# EAGLE board C (EAGLE 7.5.0)
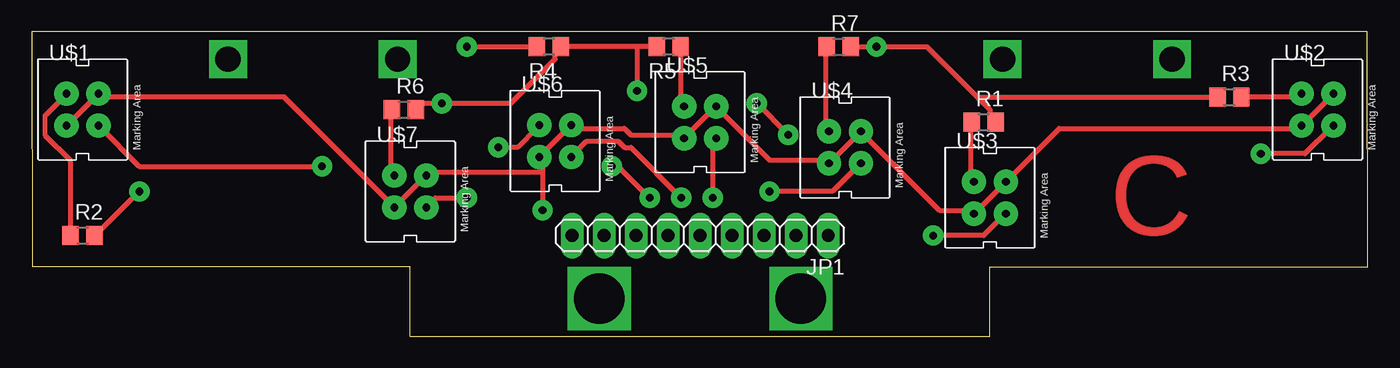
[diagram p0: board, top side]
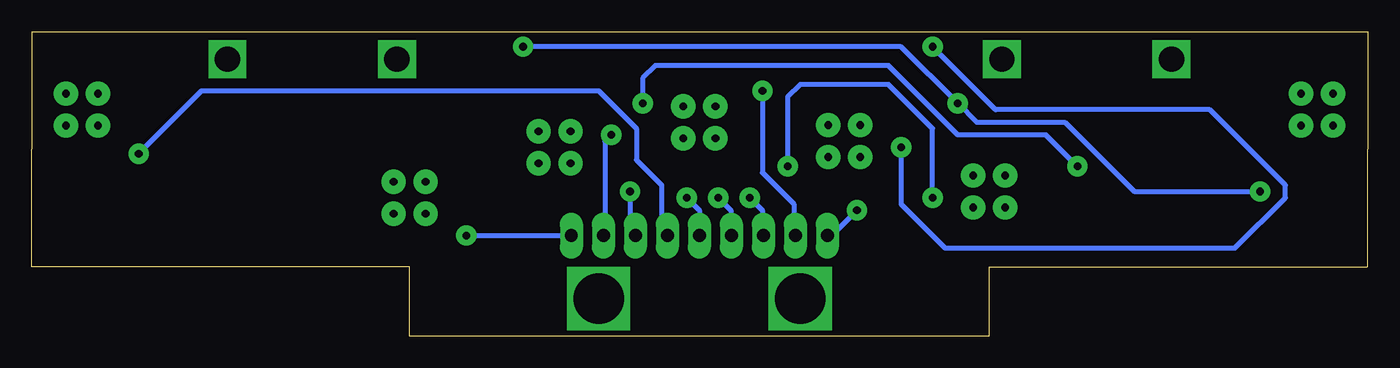
[diagram p1: board, bottom side, seen from below]

Size 106.05 x 24.21 mm. Coordinates in mm from the lower left corner, seen from the top.
Outline: 30.05,0 76.05,0 76.05,5.5 106.05,5.5 106,24.21 0,24.21 0.05,5.5 30.05,5.5 30.05,0
Copper layers (1*16): Top 0.035mm / dielectric 1.5mm / Bottom 0.035mm
Design rules "default *": minimum track width 0.4mm, minimum drill 24mil, track to track 20mil, track to pad 20mil, pad to pad 20mil, via to via 20mil, smd to smd 20mil, copper to edge 15mil, drill to drill 25mil, minimum pad ring 0.4mm, minimum via ring 0.5mm, stop-mask expansion 4mil, vias tented up to drill 0mil, thermal gap 10mil
tRestrict: area 42.1,6.5 to 64.1,9.5
bRestrict: area 0.6,14 to 7.6,22; area 26.6,7.5 to 33.6,15.5; area 38.1,11.5 to 45.1,19.5; area 49.6,13 to 56.6,21; area 61.1,11 to 68.1,19; area 72.6,7 to 79.6,15; area 98.6,14 to 105.6,22

## Footprints (pad centres in the part's own frame; a part is rotated, then mirrored left to right if it is on the bottom)
1X09 = drill 1.016 long: 1 -10.16,0; 2 -7.62,0; 3 -5.08,0; 4 -2.54,0; 5 0,0; 6 2.54,0; 7 5.08,0; 8 7.62,0; 9 10.16,0
R0805 = smd 1.3 x 1.5: 1 -0.95,0; 2 0.95,0
4 = drill 0.61 pad 1.93: A -1.27,1.27; C 1.27,-1.27; E 1.27,1.27; K -1.27,-1.27

## Placement (x,y rotation side)
JP1  [1X09]  53.05,8 180 top
R1  [R0805]  75.55,17 0 top
R2  [R0805]  4.05,8 0 top
R3  [R0805]  95.05,19 0 top
R4  [R0805]  41.05,23 180 top
R5  [R0805]  50.55,23 180 top
R6  [R0805]  29.55,18 0 top
R7  [R0805]  64.05,23 0 top
U$1  CNY70  [4]  4.05,18 0 top
U$2  CNY70  [4]  102.05,18 0 top
U$3  CNY70  [4]  76.05,11 0 top
U$4  CNY70  [4]  64.55,15 0 top
U$5  CNY70  [4]  53.05,17 0 top
U$6  CNY70  [4]  41.55,15.5 0 top
U$7  CNY70  [4]  30.05,11.5 0 top

## Library data of the parts
JP1 = pinhead
R1-R7 = resistor
U$1-U$7 = cny70

## Nets
5V: JP1.8 R1.2 R2.2 R3.1 R4.1 R5.2 R6.2 R7.2
GND: JP1.9 U$1.E U$1.K U$2.E U$2.K U$3.E U$3.K U$4.E U$4.K U$5.E U$5.K U$6.E U$6.K U$7.E U$7.K
N$1: R2.1 U$1.A
N$3: R3.2 U$2.A
N$5: R1.1 U$3.A
N$7: R7.1 U$4.A
N$11: R5.1 U$5.A
N$13: R4.2 U$6.A
N$15: R6.1 U$7.A
OUT0: JP1.1 U$3.C
OUT1: JP1.2 U$1.C
OUT2: JP1.3 U$4.C
OUT3: JP1.4 U$2.C
OUT4: JP1.5 U$5.C
OUT5: JP1.6 U$6.C
OUT6: JP1.7 U$7.C

## Tracks (layer width: path | path; a pad name or v marks a point on that pad's centre or on a via)
5V  (via drill 0.61)
  Top 0.4: 75.05,19 71.05,23 v67.05,23 R7.2 | 75.05,19 76.05,18 76.05,17 R1.2 | 75.05,19 R3.1 | R5.2 48.05,23 | 48.05,23 R4.1 41.55,23 41.55,22 38.05,18.5 v32.55,18.5 31.05,18.5 30.55,18 R6.2 | 48.05,23 v48.05,19.5 | v8.55,11.5 5.05,8 R2.2
  Bottom 0.4: v48.05,19.5 48.05,13 45.55,10.5 45.55,8 JP1.8 | v8.55,11.5 18.55,11.5 24.05,17 31.05,17 v32.55,18.5 37.05,23 v67.05,23
GND  (via drill 0.61)
  Top 0.4: U$2.E U$2.K 100.55,16.5 81.55,16.5 U$3.E U$3.K 74.55,10 72.05,10 66.05,16 U$4.E U$4.K 63.05,14 58.55,14 54.55,18 U$5.E U$5.K 51.55,16 47.55,16 47.05,16.5 43.05,16.5 U$6.E U$6.K 40.55,14 40.55,13 | U$1.K U$1.E 5.55,19 20.05,19 28.55,10.5 U$7.K U$7.E 31.55,13 40.55,13 | 40.55,13 v40.55,10
  Bottom 0.4: v40.55,10 42.55,8 JP1.9
N$1
  Top 0.4: R2.1 3.05,8 3.05,14 1.05,16 1.05,17.5 2.55,19 U$1.A
N$2  (via drill 2)
  other vias: 29.05,22
N$3
  Top 0.4: R3.2 100.55,19 U$2.A
N$4  (via drill 2)
  other vias: 90.51,22
N$5
  Top 0.4: R1.1 74.55,17 74.55,12.5 U$3.A
N$6  (via drill 2)
  other vias: 15.59,22
N$7
  Top 0.4: R7.1 63.05,23 63.05,16.5 U$4.A
N$8  (via drill 4)
  other vias: 45.05,3
N$9  (via drill 4)
  other vias: 61.05,3
N$10  (via drill 2)
  other vias: 77.05,22
N$11
  Top 0.4: R5.1 51.55,23 51.55,18.5 U$5.A
N$13  (via drill 0.61)
  Top 0.4: v34.55,23 R4.2 | v37.05,15 38.55,15 40.05,16.5 U$6.A
  Bottom 0.4: v34.55,23 29.55,18 12.55,18 6.55,12 6.55,11 10.55,7 33.55,7 37.05,10.5 v37.05,15
N$15
  Top 0.4: R6.1 28.55,18 28.55,13 U$7.A
OUT0  (via drill 0.61)
  Top 0.4: v71.55,8 75.55,8 77.05,9.5 U$3.C
  Bottom 0.4: v71.55,8 JP1.1
OUT1  (via drill 0.61)
  Top 0.4: v57.55,18.5 v60.05,16 | v23.05,13.5 8.55,13.5 U$1.C
  Bottom 0.4: v60.05,16 60.55,15.5 60.55,8 JP1.2 | v57.55,18.5 57.55,20.5 56.55,21.5 38.05,21.5 32.55,16 25.55,16 v23.05,13.5
OUT2  (via drill 0.61)
  Top 0.4: v58.55,11.5 63.55,11.5 65.55,13.5 U$4.C
  Bottom 0.4: v58.55,11.5 58.55,8 JP1.3
OUT3  (via drill 0.61)
  Top 0.4: v97.55,14.5 101.05,14.5 103.05,16.5 U$2.C
  Bottom 0.4: v97.55,14.5 92.55,19.5 61.05,19.5 58.05,16.5 58.05,14 56.05,12 56.05,8 JP1.4
OUT4  (via drill 0.61)
  Top 0.4: v54.05,11 54.05,15.5 U$5.C
  Bottom 0.4: JP1.5 53.05,10 v54.05,11
OUT5  (via drill 0.61)
  Top 0.4: v51.55,11 47.55,15 47.05,15 46.55,15.5 44.05,15.5 43.05,14.5 U$6.C
  Bottom 0.4: v51.55,11 50.55,10 50.55,8 JP1.6
OUT6  (via drill 0.61)
  Top 0.4: v49.05,11 46.55,13.5 v46.05,13.5 | v34.55,11 32.05,11 31.55,10.5 U$7.C
  Bottom 0.4: v49.05,11 48.05,10 48.05,8 JP1.7 | v46.05,13.5 46.05,19 45.05,20 38.05,20 34.55,16.5 v34.55,11

## Text on the board
Top: C